# Altium PCB dian_recruitment_2022_V1.PcbDoc
Units mil, origin at the board's own origin, x right, y up, seen from the top; angles counter-clockwise.
Board outline 1377.95 x 1771.65 mil, 2 copper layers (Top Layer, Bottom Layer); 48 components, 35 nets, 214 pads, 93 vias.
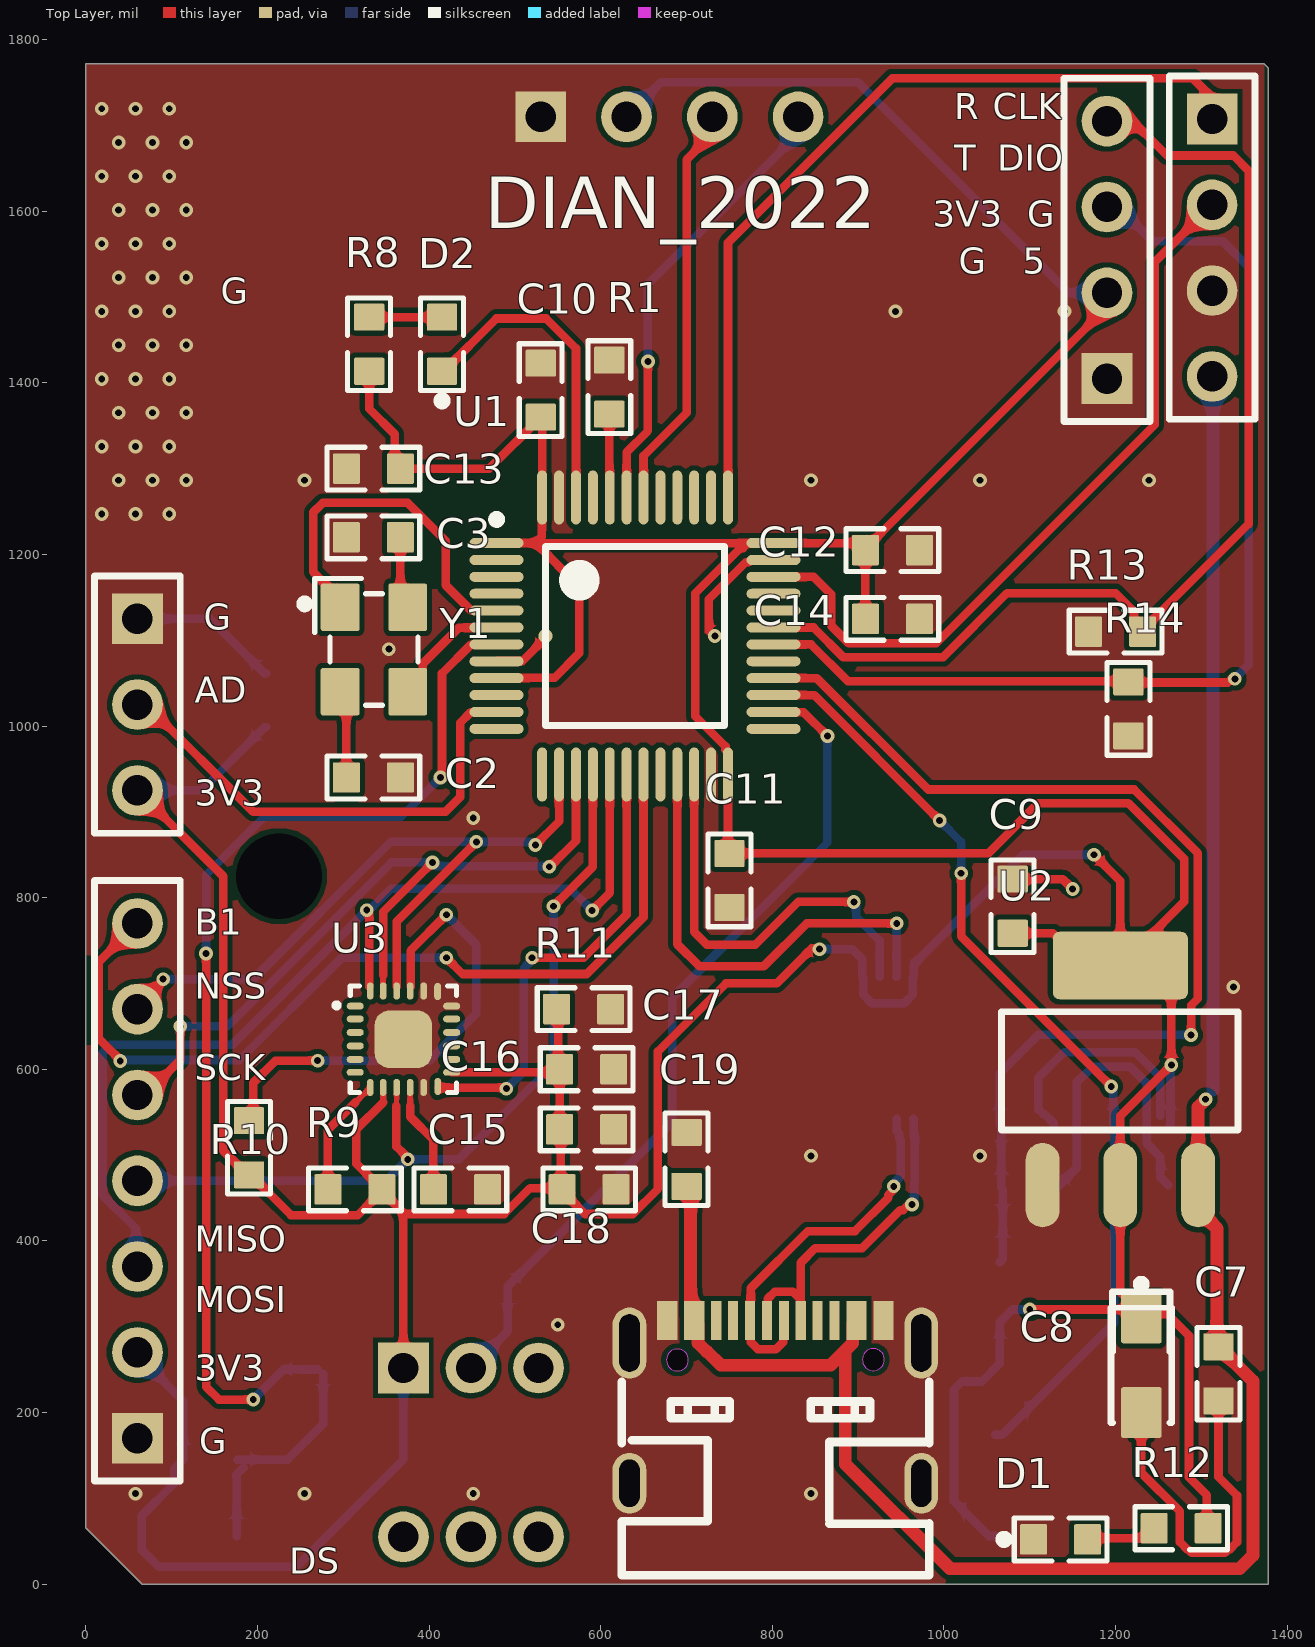
[diagram p0: Top Layer view]
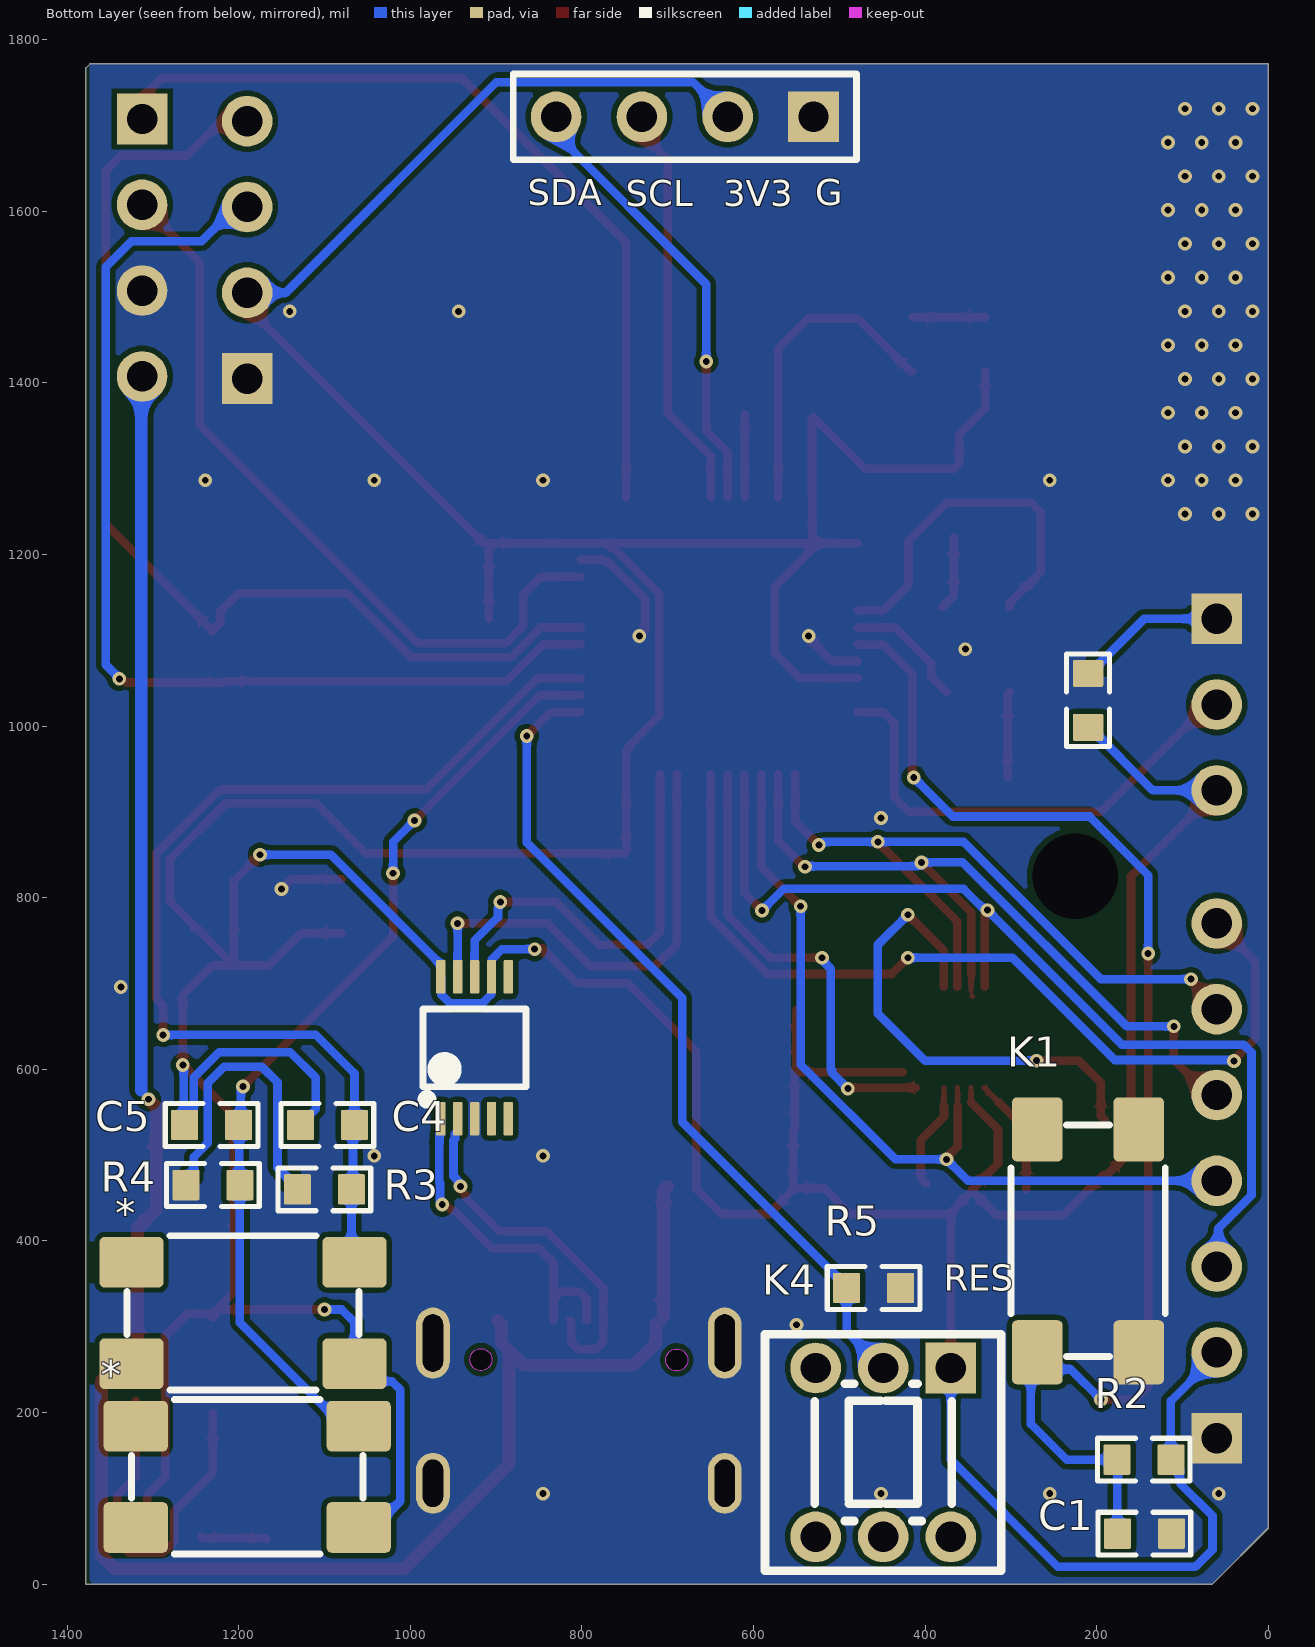
[diagram p1: Bottom Layer view, seen from below]
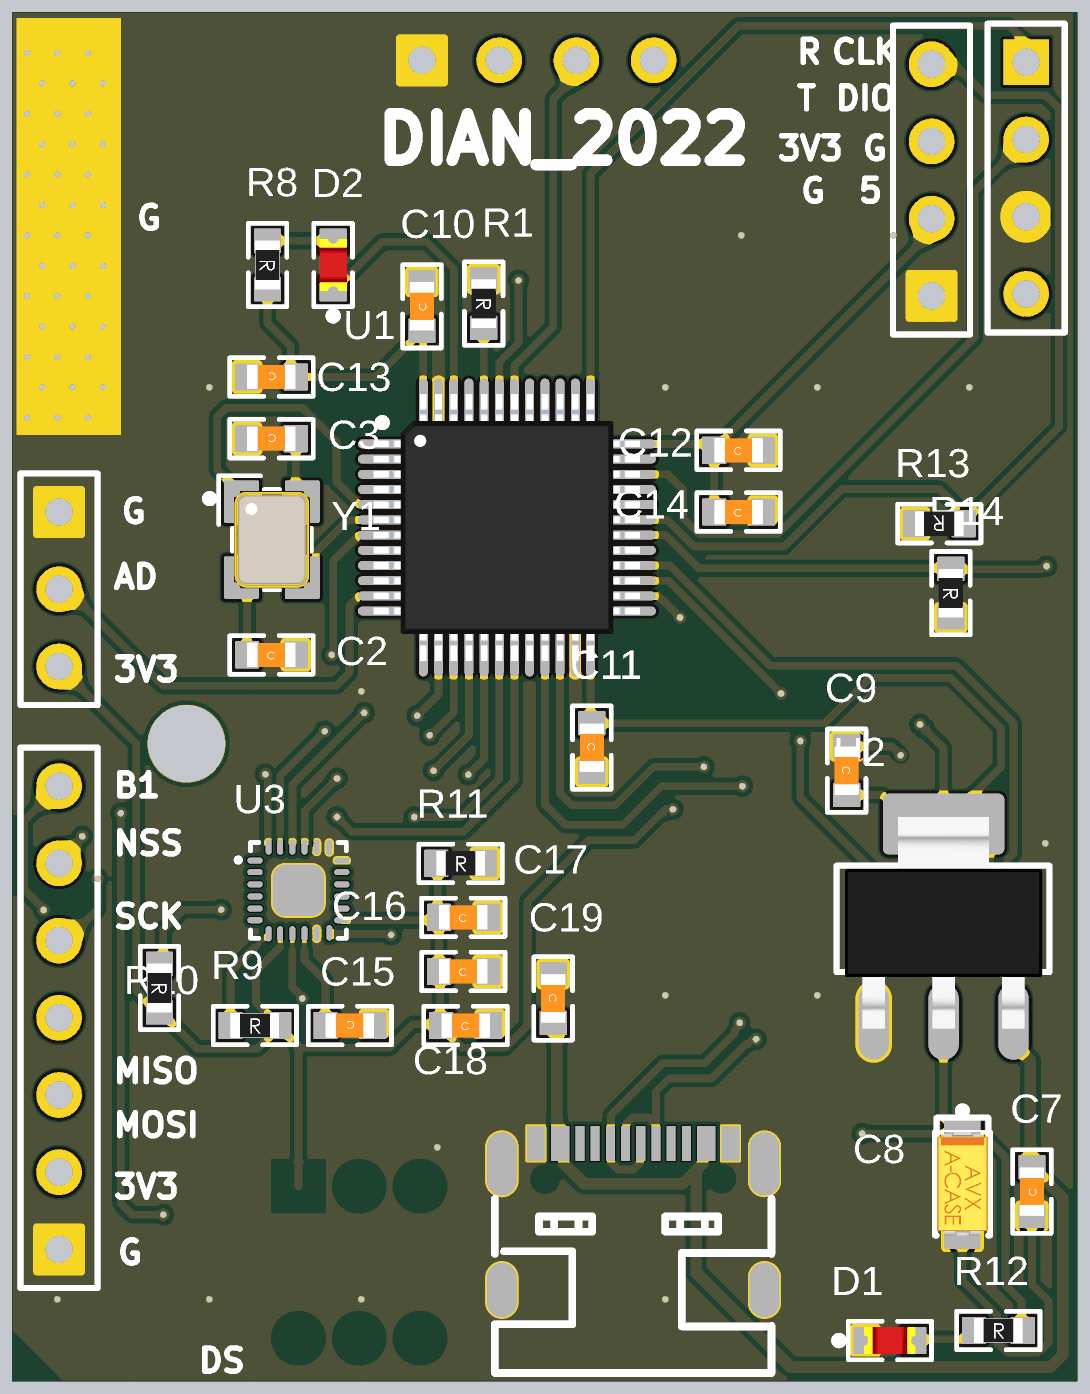
[diagram p2: 3D render of the assembled board from above, using the file's embedded part models]
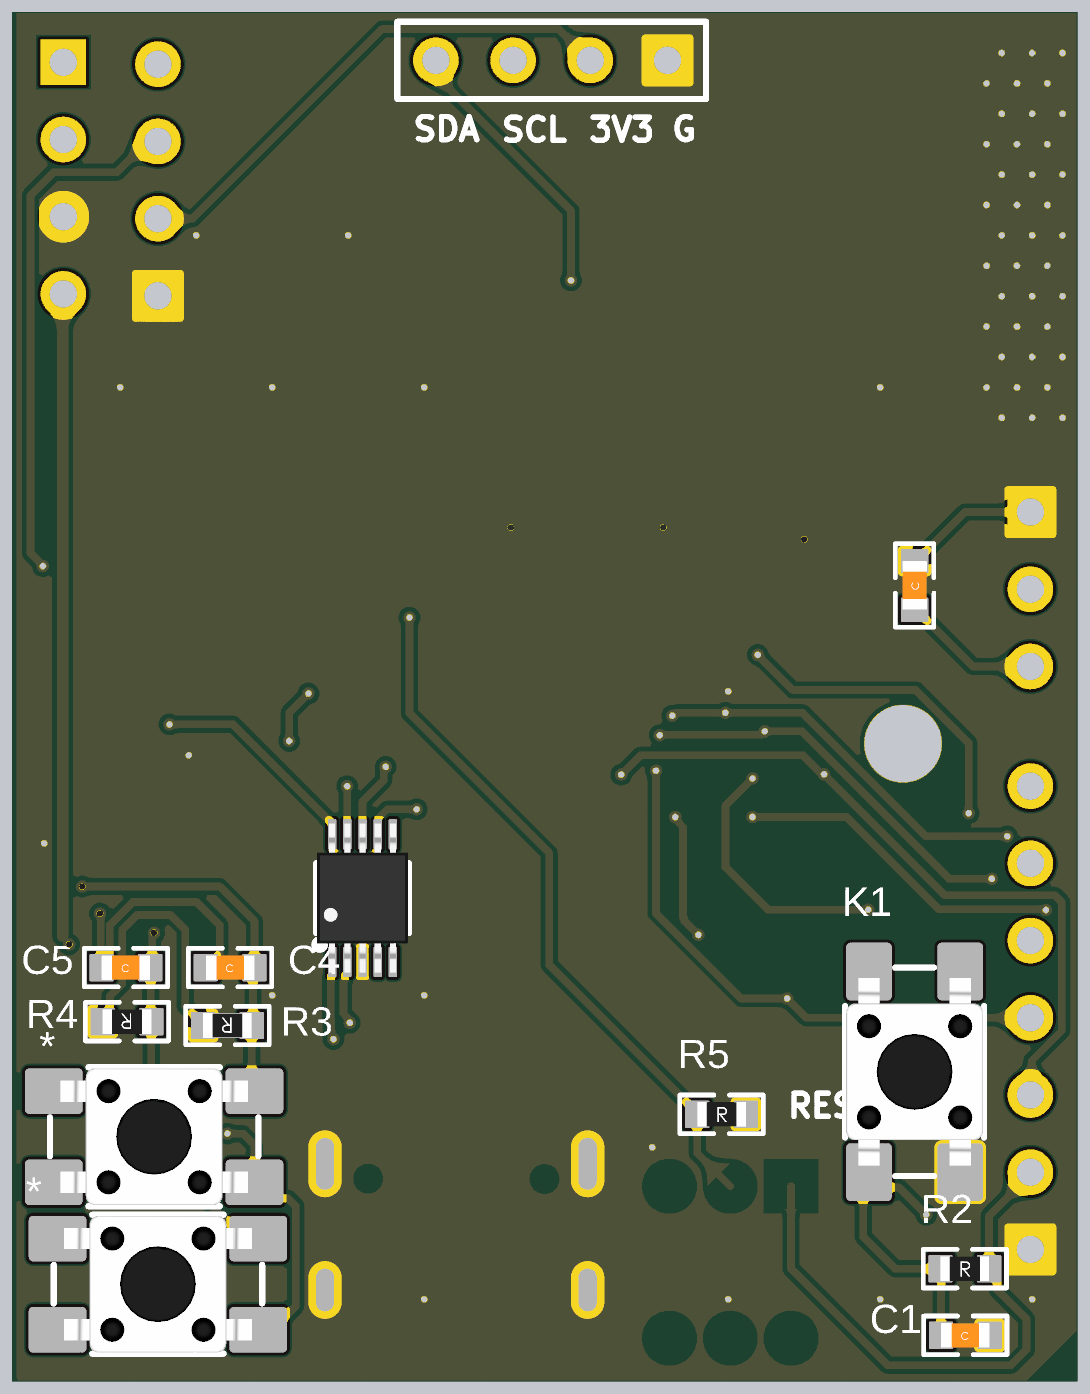
[diagram p3: 3D render of the assembled board from below, using the file's embedded part models]

## Layer stack, top to bottom
Top Solder: solder mask 0.4, Solder Resist, Dk 3.5
Top Layer: signal copper 1.4
Dielectric 1: dielectric 12.6, FR-4, Dk 4.8
Bottom Layer: signal copper 1.4
Bottom Solder: solder mask 0.4, Solder Resist, Dk 3.5

## Board outline
0,65 65,0 1377.95,0 1377.95,1767.05 1373.35,1771.65 0,1771.65

## Design rules (kind name [scope] priority, off if disabled: settings)
Clearance [All] p1: gap=6 ignorepadtopadclearanceinfootprint=FALSE
DiffPairsRouting DiffPairsRouting_1 [All] p1: maxlimit=10 minlimit=10 mostfreqgap=10 toplayer_minwidth=15 toplayer_maxwidth=15 toplayer_prefwidth=15 bottomlayer_minwidth=15 bottomlayer_maxwidth=15 bottomlayer_prefwidth=15 maxuncoupledlength=500
DiffPairsRouting DiffPair_DiffPairsRouting [All] p2: maxlimit=10 minlimit=10 mostfreqgap=10 toplayer_minwidth=10 toplayer_maxwidth=10 toplayer_prefwidth=10 bottomlayer_minwidth=10 bottomlayer_maxwidth=10 bottomlayer_prefwidth=10 maxuncoupledlength=500
DiffPairsRouting DiffPair_DiffPairsRouting_1 [InDifferentialPair ('NewDifferentialPair1')] p3: maxlimit=10 minlimit=10 mostfreqgap=10 toplayer_minwidth=10 toplayer_maxwidth=15 toplayer_prefwidth=10 bottomlayer_minwidth=10 bottomlayer_maxwidth=15 bottomlayer_prefwidth=10 maxuncoupledlength=500
DiffPairsRouting [All] p4: maxlimit=10 minlimit=10 mostfreqgap=10 toplayer_minwidth=15 toplayer_maxwidth=15 toplayer_prefwidth=15 bottomlayer_minwidth=15 bottomlayer_maxwidth=15 bottomlayer_prefwidth=15 maxuncoupledlength=500
MatchedLengths [All] p1: tolerance=1000 checknetsindiffpair=FALSE checkdiffpairvsdiffpair=TRUE checkxsignals=TRUE checkothers=TRUE
MatchedLengths DiffPair_MatchedLengths [All] p2: tolerance=1000 checknetsindiffpair=FALSE checkdiffpairvsdiffpair=TRUE checkxsignals=TRUE checkothers=TRUE
MatchedLengths DiffPair_MatchedLengths_1 [InDifferentialPair ('NewDifferentialPair1')] p3: tolerance=1000 checknetsindiffpair=FALSE checkdiffpairvsdiffpair=TRUE checkxsignals=TRUE checkothers=TRUE
PolygonConnect [All] p1: connectstyle=Direct reliefconductorwidth=10 reliefentries=4 polygonreliefangle="90 Angle" airgapwidth=10
RoutingVias [All] p1: holewidth=8 width=16 viastyle="Through Hole" minholewidth=0 minwidth=0 maxholewidth=8 maxwidth=16
SolderMaskExpansion [All] p1: expansion=4 istentingtop=FALSE
Width ALL [All] p1: maxlimit=15 minlimit=6 preferedwidth=10
29 further rules are at their usual default settings.

## Classes and differential pairs
component class dian_recruitment_2022_V1: C1 C2 C3 C4 C5 C7 C8 C9 C10 C11 C12 C13 C14 C15 C16 C17 C18 C19 D1 D2 K1 K4 R1 R2 R3 R4 R5 R8 R9 R10 R11 R12 R13 R14 U1 U2 U3 Y1

## Components (designator, comment, footprint, x,y, rotation, side; value= is the part's Value field where it differs from the comment)
* "PB13" KEY-4.5*4.5mm 1190,125 r0 bottom value=1TS002E-2500-2501-CT_3*6*2.5_SMD2.5 (schematic designator K3)
* "PB13" KEY-4.5*4.5mm 1194.92,315.94 r0 bottom value=1TS002E-2500-2501-CT_3*6*2.5_SMD2.5 (schematic designator K2)
C1 "100nF" 0603_C 144.25,58.74 r180 bottom
C2 "20pF" 0603_C 335,940 r0 top
C3 "20pF" 0603_C 335,1220 r180 top
C4 "104" 0603_C 1096.5,535 r180 bottom
C5 "104" 0603_C 1231.5,535 r180 bottom
C6 "104" 0603_C 210,1030 r90 bottom
C7 "0.1uF" 0603_C 1320,245 r90 top
C8 "220uF" CTan-A 1230,255 r90 top
C9 "0.1uF" 0603_C 1080,790 r270 top
C10 "100nF" 0603_C 530,1391.5 r90 top
C11 "100nF" 0603_C 750,820 r270 top
C12 "100nF" 0603_C 940,1205 r0 top
C13 "100nF" 0603_C 335,1300 r180 top
C14 "100nF" 0603_C 940,1125 r0 top
C15 "100nF" 0603_C 436.5,460 r180 top
C16 "10nF" 0603_C 583.5,530 r0 top
C17 "100nF" 0603_C 583.5,600 r0 top
C18 "1uF" 0603_C 586.5,460 r0 top
C19 "104" 0603_C 700,495 r270 top
D1 "PC4" 0603_LED_RED 1135.94,52 r0 top
D2 "PC4" 0603_LED_RED 415,1445 r90 top
K1 "NRST" KEY-4.5*4.5mm 210,400 r90 bottom value=1TS002E-2500-2501-CT_3*6*2.5_SMD2.5
K4 "PB13" key 1701.55,250.64 r180 bottom value=1TS002E-2500-2501-CT_3*6*2.5_SMD2.5
P1 "Header 4" HDR1X4 1312.5,1707.5 r270 top
P2 "Header 4" HDR1X4 530,1710 r0 bottom
P3 "Header 3" HDR1X3 60,1125 r270 top
P4 "Header 4" HDR1X4 1190,1405 r90 top
P5 "Header 7" HDR1X7 60,170 r90 top
R1 "10K" 0603_R 610,1395 r270 top
R2 "10K" 0603_R 145,145 r180 bottom
R3 "10K" 0603_R 1100,460 r0 bottom
R4 "10K" 0603_R 1230,465 r0 bottom
R5 "10K" 0603_R 460,345 r180 bottom
R8 "Res2" 0603_R 330,1445 r270 top value=2K
R9 "4.7K" 0603_R 313.5,460 r0 top
R10 "4.7K" 0603_R 190,508.5 r270 top
R11 "4.7K" 0603_R 580,670 r0 top
R12 "Res2" 0603_R 1276.5,65 r0 top value=2K
R13 "10K" 0603_R 1200,1110 r180 top
R14 "10K" 0603_R 1215,1020 r270 top
U1 "STM32F103C8T6" LQFP-48P 640,1105 r270 top
U2 "AMS1117-3.3" SOT-223 1205.55,592.95 r270 top
U3 "MPU6500" QFN24 375,630 r270 top
USB1 "TYPEC-304-ACP16" USB_TYPEC 820,135 r0 top
Y1 "8M" XTAL-3225 335.63,1089.21 r0 top value=1C208000CE0R_SMD-3225_4P_SMD0.85
? "" MSOP-10P[0.5] 925,625 r90 bottom

## Footprints (in the part's own frame and the unit in brackets; to place one, negate y for a bottom-side part, rotate by r counter-clockwise, add the part's x,y. Pads: shape width x height; smd on the part's side, far side on the other; paste and mask are expansions set on the pad)
0603_C [mm]
  rrect10% 0.8x0.9 smd: 1(-0.8,0) 2(0.8,0)
  silkscreen extent -1.37,-0.64 1.37,0.64, body extent -0.8,-0.4 0.8,0.41, height 0.87
0603_LED_RED [mm]
  rrect10% 0.8x0.9 smd: 1(0.8,0) 2(-0.8,0)
  silkscreen extent -1.8,-0.64 1.37,0.64, body extent -0.85,-0.45 0.85,0.45, height 0.9
0603_R [mm]
  rrect10% 0.8x0.9 smd: 1(-0.8,0) 2(0.8,0)
  silkscreen extent -1.37,-0.64 1.37,0.64, body extent -0.8,-0.41 0.8,0.41, height 0.51
CTan-A [mm]
  rrect10% 1.5x1.2 smd: 1(1.4,0) 2(-1.4,0)
  silkscreen extent -1.7,-0.9 2.52,0.9, body extent -1.7,-0.84 1.7,0.84, height 1.71
HDR1X3 [mm] "Connector; Header; 3 Position"
  rect 1.5x1.5 hole 0.9: 1(0,0)
  round 1.5 hole 0.9: 2(2.54,0) 3(5.08,0)
  silkscreen extent -1.27,-1.27 6.35,1.27
HDR1X4 [mm] "Connector; Header; 4 Position"
  rect 1.5x1.5 hole 0.9: 1(0,0)
  round 1.5 hole 0.9: 2(2.54,0) 3(5.08,0) 4(7.62,0)
  silkscreen extent -1.27,-1.27 8.89,1.27
HDR1X7 [mm] "Connector; Header; 7 Position"
  rect 1.5x1.5 hole 0.9: 1(0,0)
  round 1.5 hole 0.9: 2(2.54,0) 3(5.08,0) 4(7.62,0) 5(10.16,0) 6(12.7,0) 7(15.24,0)
  silkscreen extent -1.27,-1.27 16.51,1.27
key [mm]
  rect 1.5x1.5 hole 0.9 mask+0.05: 1(33.821,0.031)
  round 1.5 hole 0.9 mask+0.05: 2(31.821,0.031) 3(29.821,0.031) 4(33.821,-4.969) 5(31.821,-4.969) 6(29.821,-4.969)
  silkscreen extent 28.32,-5.97 35.32,1.03
KEY-4.5*4.5mm [mm]
  rrect20% 1.9x1.5 smd: 1(-3.3,1.5) 2(3.3,1.5) 3(-3.3,-1.5) 4(3.3,-1.5)
  silkscreen extent -3.43,-2.29 3.43,2.29, body extent -3.09,-2.25 3.09,2.25, height 3.8
LQFP-48P [mm]
  oval 0.295x1.6 smd: 1(-2.75,-4.1) 2(-2.25,-4.1) 3(-1.75,-4.1) 4(-1.25,-4.1) 5(-0.75,-4.1) 6(-0.25,-4.1) 7(0.25,-4.1) 8(0.75,-4.1) 9(1.25,-4.1) 10(1.75,-4.1) 11(2.25,-4.1) 12(2.75,-4.1) 25(2.75,4.1) 26(2.25,4.1) 27(1.75,4.1) 28(1.25,4.1) 29(0.75,4.1) 30(0.25,4.1) 31(-0.25,4.1) 32(-0.75,4.1) 33(-1.25,4.1) 34(-1.75,4.1) 35(-2.25,4.1) 36(-2.75,4.1)
  oval 1.6x0.295 smd: 13(4.1,-2.75) 14(4.1,-2.25) 15(4.1,-1.75) 16(4.1,-1.25) 17(4.1,-0.75) 18(4.1,-0.25) 19(4.1,0.25) 20(4.1,0.75) 21(4.1,1.25) 22(4.1,1.75) 23(4.1,2.25) 24(4.1,2.75) 37(-4.1,2.75) 38(-4.1,2.25) 39(-4.1,1.75) 40(-4.1,1.25) 41(-4.1,0.75) 42(-4.1,0.25) 43(-4.1,-0.25) 44(-4.1,-0.75) 45(-4.1,-1.25) 46(-4.1,-1.75) 47(-4.1,-2.25) 48(-4.1,-2.75)
  silkscreen extent -3.57,-4.22 2.65,2.65, body extent -4.39,-4.39 4.39,4.39, height 1.55
MSOP-10P[0.5] [mm]
  rrect30% 1x0.28 smd: 1(-2.1,1) 2(-2.1,0.5) 3(-2.1,0) 4(-2.1,-0.5) 5(-2.1,-1) 6(2.1,-1) 7(2.1,-0.5) 8(2.1,0) 9(2.1,0.5) 10(2.1,1)
  silkscreen extent -1.65,-1.52 1.15,1.53, body extent -2.45,-1.5 2.45,1.5, height 1.25
QFN24 [mm]
  oval 0.2x0.505 smd mask+0.051: 1(-1.108,-1.554) 2(-0.727,-1.554) 3(-0.327,-1.554) 4(0.073,-1.554) 5(0.473,-1.554) 6(0.854,-1.554) 13(0.854,1.3) 14(0.473,1.3) 15(0.073,1.3) 16(-0.327,1.3) 17(-0.727,1.3) 18(-1.108,1.3)
  oval 0.505x0.2 smd mask+0.051: 7(1.3,-1.108) 8(1.3,-0.727) 9(1.3,-0.327) 10(1.3,0.073) 11(1.3,0.473) 12(1.27,0.889) 19(-1.538,0.885) 20(-1.554,0.473) 21(-1.554,0.073) 22(-1.554,-0.327) 23(-1.554,-0.727) 24(-1.554,-1.108)
  rrect50% 1.7x1.7 smd mask+0.051: 25(-0.127,-0.127)
  silkscreen extent -1.7,-2.18 1.45,1.45
SOT-223 [mm]
  oval 2.5x1 smd: 1(3.25,-2.3) 2(3.25,0) 3(3.25,2.3)
  rrect20% 2x4 smd: 4(-3.25,0)
  silkscreen extent -1.88,-3.52 1.62,3.48, body extent -3.48,-3.25 3.48,3.25, height 1.65
USB_TYPEC [mm]
  rect 0.6x1.15 smd mask+0.05: A1B12(-3.618,4.375) A4B9(-2.818,4.375) B1A12(2.782,4.375) B4A9(1.982,4.375)
  rect 0.3x1.15 smd mask+0.05: A5(-1.668,4.375) A6(-0.668,4.375) A7(-0.168,4.375) A8(0.832,4.375) B5(1.332,4.375) B6(0.332,4.375) B7(-1.168,4.375) B8(-2.168,4.375)
  oval 1x1.8 hole 0.6 slot 1.4 at 90 deg mask+0.05: EP(-4.738,-0.445) EP(3.902,-0.445)
  oval 1x2.1 hole 0.6 slot 1.7 at 90 deg mask+0.05: EP(-4.738,3.705) EP(3.902,3.705)
  Keep-Out Layer board cut-out: 2.807,3.215 2.775,3.356 2.685,3.469 2.554,3.532 2.41,3.532 2.279,3.469 2.189,3.356 2.157,3.215 2.157,3.215 2.189,3.074 2.279,2.961 2.41,2.898 2.554,2.898 2.685,2.961 2.775,3.074 2.807,3.215
  Keep-Out Layer board cut-out: -2.993,3.205 -3.025,3.346 -3.115,3.459 -3.246,3.522 -3.39,3.522 -3.521,3.459 -3.611,3.346 -3.643,3.205 -3.643,3.205 -3.611,3.064 -3.521,2.951 -3.39,2.888 -3.246,2.888 -3.115,2.951 -3.025,3.064 -2.993,3.205
  silkscreen extent -4.97,-3.17 4.13,2.56
XTAL-3225 [mm]
  rrect10% 1.15x1.4 smd: 1(-1,1.25) 2(-1,-1.25) 3(1,-1.25) 4(1,1.25)
  silkscreen extent -2.17,-1.65 1.3,2.1, body extent -1.25,-1.6 1.25,1.6, height 0.61

## Part data
* * K1 K4: library part KEY, "KEY_SWI", Manufacturer=HYP, Assembly=SMD, Price_Batch=2.03, Price_Sample=2.03, Type=SWI
C1 C4 C5 C6 C10 C11 C12 C13 C14 C15 C16 C17 C18 C19: library part Capacitor
C2 C3: library part Capacitor_6
C7 C9: library part Cap, "Capacitor", LatestRevisionDate=17-Jul-2002, LatestRevisionNote="Re-released for DXP Platform.", PackageDescription="Radial Cap, Thru-Hole; 2 Leads; 0.3 in Pin Spacing", PackageReference=RAD-0.3, Published=8-Jun-2000, Publisher="Altium Limited"
C8: library part "Cap Pol1", "Polarized Capacitor (Radial)", LatestRevisionDate=17-Jul-2002, LatestRevisionNote="Re-released for DXP Platform.", PackageDescription="Polarized Capacitor (Radial); 2 Leads", PackageReference=RB7.6-15, Published=8-Jun-2000, Publisher="Altium Limited"
D1 D2: library part "0603 蓝灯", "发光二极管", Package=0603, SuppliersPartNumber=C72041, ComponentLink1Description=供应商链接, ComponentLink1URL=http://www.szlcsc.com/product/details_73150.html, Supplier=LC
P1 P2 P4: "Header, 4-Pin", LatestRevisionDate=17-Jul-2002, LatestRevisionNote="Re-released for DXP Platform.", Publisher="Altium Limited"
P3: "Header, 3-Pin", LatestRevisionDate=17-Jul-2002, LatestRevisionNote="Re-released for DXP Platform.", Publisher="Altium Limited"
P5: "Header, 7-Pin", LatestRevisionDate=17-Jul-2002, LatestRevisionNote="Re-released for DXP Platform.", Publisher="Altium Limited"
R1 R2 R3 R4 R5 R9 R10 R11 R13 R14: library part Resistor
R8 R12: "Resistor", LatestRevisionDate=17-Jul-2002, LatestRevisionNote="Re-released for DXP Platform.", PackageDescription="Axial Device, Thru-Hole; 2 Leads; 0.4 in Pin Spacing", PackageReference=AXIAL-0.4, Published=8-Jun-2000, Publisher="Altium Limited"
U2: library part AMS1117
U3: JLCPCB Part Class="Extended Part", Manufacturer="TDK InvenSense(应美盛)", Add into BOM=yes, Convert to PCB=yes, Datasheet=https://atta.szlcsc.com/upload/public/pdf/source/20170505/1493957890595.pdf, Device=MPU6500, LCSC Part Name=MPU6500, Manufacturer Part=MPU6500, Name=MPU6500, Supplier=LCSC, Supplier Footprint=QFN-24, Supplier Part=C50278, Symbol=MPU6500
USB1: Current Rating - Power (Max)=3A, JLCPCB Part Class="Extended Part", LCSC Part Name="Type-C 母座 卧贴", Manufacturer=XUNPU(讯普), Operating Temperature Range=-40℃~+85℃, Add into BOM=yes, Connector Type=Type-C, Convert to PCB=yes, Datasheet=https://atta.szlcsc.com/upload/public/pdf/source/20220311/3C907F75E12F45E4EE7F73565AB9C294.pdf, Device=TYPEC-304-ACP16, Gender=母座, Manufacturer Part=TYPEC-304-ACP16, Mounting Style=卧贴, Name=TYPEC-304-ACP16, Number of Contacts=16, Number of Ports=1, Supplier=LCSC, Supplier Footprint=SMD, Supplier Part=C2982555, Symbol=TYPEC-304-ACP16
Y1: library part XTAL_4P, "Crystal Oscillator", Manufacturer=EPS, Assembly=SMD, Type=CY
?: library part CH340E, "CH340E", JLCPCB Part Class="Extended Part", Manufacturer=WCH(南京沁恒), Supply Voltage="3.3V, 5V", Add into BOM=yes, Convert to PCB=yes, Data Rate=2Mbps, Datasheet=https://atta.szlcsc.com/upload/public/pdf/source/20200819/C99652_97FFC0DF2539BFF05CD752AD9221D632.pdf, Device=CH340E, LCSC Part Name=CH340E, Manufacturer Part=CH340E, Name=CH340E, Number of Drivers/Receivers=-, Protocol="USB 2.0", Supplier=LCSC, Supplier Footprint=MSOP-10, Supplier Part=C99652, Symbol=CH340E, Type=Transceiver

## Free pads (board coordinates)
  round 60 hole 100: 2(225,825)

## Via types
v1: diameter 16, hole 8, Top Layer to Bottom Layer, tented both sides, 77 vias
v2: diameter 15.98, hole 8, Top Layer to Bottom Layer, tented both sides, 16 vias

## Nets (pads, with @x,y where several pads share a name; then routed paths per layer and width w, separated by ;. In a path a pad name is that pad's centre, name@x,y a point inside that pad or via, vN(x,y) a via of type N, cw(c..) or ccw(c..) an arc to the next point about the centre after c; other vN are vias at no path point)
5V: C7.2 C19.2 P1.4 U2.3 USB1.A4B9 USB1.B4A9 | length 2488.8
  Top Layer w15: C19.2 704.74,458.76 704.74,311.56 USB1.A4B9 713.37,302.94 713.37,280.89 723.15,271.11 723.89,271.11 740,255 867.83,255 885,272.17 ; USB1.B4A9 893.72,302.94 893.72,280.89 885,272.17 ; v1(1305,565) 1305,564.73 1296.1,555.83 1296.1,436.43 1318.03,414.5 1318.03,278.46 C7.2 1321.97,276.5 1330.22,268.25 1330.22,266.28 1360,236.5 1360,33.35 1344.42,17.78 1007.22,17.78 885,140 885,272.17
  Bottom Layer w15: P1.4@1304.07,1415.93 P1.4 ; 1313.5,575.94 P1.4@1313.5,1407.5
ADC1: P3.2 U1.11 | length 569.4
  Top Layer w10: P3.2 70,1025 195,900 419.14,900 436.09,916.94 436.09,1003.69 448.5,1016.11 478.27,1016.11 U1.11
AUX_CL: R9.1 U3.7 | length 139.2
  Top Layer w6: 313.79,561.21 U3.7
  Top Layer w10: R9.1 282.01,529.43 313.79,561.21
AUX_DA: R10.1 U3.21 | length 570.3
  Top Layer w10: R10.1 195,545 195,584.14 220.86,610 v1(270,610) ; U3.21@378.32,696.14 378.32,738.32 v1(420,780)
  Bottom Layer w10: v1(270,610) 400,610 455,665 455,745 v1(420,780)
button1: *.3@1065,375 C4.2 R3.1 U1.28 | length 1255.4
  Top Layer w10: U1.28 851.8,1055.79 981.59,926 1221.63,926 1296,851.63 1296,682.3 1288,674.3 v1(1288,640)
  Bottom Layer w10: *.3@1065,375 1068.5,378.5 R3.1 ; C4.2 1065,595 1110,640 v1(1288,640) ; R3.1@1066.75,461.75 C4.2@1066.75,535
button2: *.3@1060.08,184.06 C5.2 R4.1 U1.27 | length 1117.5
  Top Layer w10: U1.27 848.86,1036.1 v1(995,890) ; v1(1020,828.5) 1020,755 v1(1195,580)
  Bottom Layer w10: v1(995,890) 1020,865 v1(1020,828.5) ; *.3@1060.08,174.06 1067.95,174.06 1198.5,304.61 R4.1 1199.25,465.74 1199.25,534.25 C5.2 1197.5,537.5 1197.5,577.5 v1(1195,580)
button_self_lock: K4.2 R5.1 U1.26 | length 982.9
  Top Layer w10: U1.26 801.73,1016.11 836.33,1016.11 v1(864.16,988.28)
  Bottom Layer w10: K4.2 491.5,294.6 R5.1 491.5,346.97 683.2,538.68 683.2,683.2 864.16,864.16 v1(864.16,988.28)
GND: ?.3 C1.2 C2.2 C3.2 C6.2 C7.1 C8.2 C9.1 C10.2 C11.2 C12.2 C13.2 C14.2 C15.1 C16.2 C17.2 C18.2 C19.1 D1.2 K1.3 P1.3 P2.1 P3.1 P4.1 P5.1 R1.1 R3.2 R4.2 R5.2 R11.2 R13.2 R14.2 U1.8 U1.23 U1.35 U1.47 U2.1 U3.11 U3.18 U3.19 U3.20 U3.25 USB1.A1B12 USB1.B1A12 USB1.EP | length 1243.2
  Top Layer w10: U1.8 478.89,1075.78 508.66,1075.78 535.67,1102.79 v1(535.67,1105) ; v1(733,1105) 731.86,1105 726,1110.86 726,1147.94 768.77,1190.7 772.41,1190.7 775.29,1193.58 U1.35 ; C9.1 1138.5,821.5 v1(1150,810) ; C8.2 1230,129.82 1275,84.82 1275,48.93 1283.93,40 1284.89,40 1288.61,36.28 1327.37,36.28 1331.09,40 1332.57,40 1341.5,48.93 1341.5,103.32 1320,124.82 C7.1
  Bottom Layer w10: P3.1 144.52,1125 208.03,1061.5 C6.2 ; R3.2 1131.5,461.97 1154.74,485.22 1154.74,584.74 1173,603 1217,603 1236.24,583.76 1236.24,513.66 1252.18,497.72 1252.18,474.32 R4.2
  other v1: 18.39,1247.09 57.76,1247.09 97.13,1247.09 38.07,1286.46 77.44,1286.46 116.81,1286.46 18.39,1325.83 57.76,1325.83 97.13,1325.83 38.07,1365.2 77.44,1365.2 116.81,1365.2 18.39,1404.57 57.76,1404.57 97.13,1404.57 38.07,1443.94 77.44,1443.94 116.81,1443.94 18.39,1483.31 57.76,1483.31 97.13,1483.31 38.07,1522.68 77.44,1522.68 116.81,1522.68 18.39,1562.05 57.76,1562.05 97.13,1562.05 38.07,1601.42 77.44,1601.42 116.81,1601.42 18.39,1640.79 57.76,1640.79 97.13,1640.79 38.07,1680.16 77.44,1680.16 116.81,1680.16 18.39,1719.53 57.76,1719.53 97.13,1719.53
  other v2: 57.76,105.35 254.61,105.35 451.46,105.35 845.16,105.35 549.88,302.2 845.16,499.06 1042.01,499.06 1337.28,695.91 451.46,892.76 353.03,1089.61 254.61,1286.46 845.16,1286.46 1042.01,1286.46 1238.86,1286.46 943.58,1483.31 1140.43,1483.31
I2C1_SCL: P2.3 U1.42 | length 476.8
  Top Layer w10: U1.42 649.84,1314.84 700,1365 700,1660 730,1690 P2.3
I2C1_SDA: P2.4 U1.43 | length 520.5
  Top Layer w10: U1.43 630.16,1319.1 655,1343.94 v1(655,1425)
  Bottom Layer w10: v1(655,1425) 655,1515 P2.4@840,1700
IMU_INT: U1.18 U3.12 | length 538.8
  Top Layer w10: U3.12@411.06,578.53 488.85,578.53 v1(490,577.38) ; v1(520,730) 580,730 630.16,780.16 U1.18
  Bottom Layer w10: v1(490,577.38) 508.49,595.87 508.49,598.49 510,600 510,717.14 520,727.14 v1(520,730)
IMU_VCC: *.1 ?.7 ?.10 C4.1 C5.1 C6.1 C8.1 C9.2 C10.1 C11.1 C12.1 C13.1 C14.1 C16.1 C17.1 C18.1 K4.1 P2.2 P3.3 P4.2 P5.2 R2.2 R8.2 R9.2 R10.2 R11.1 R12.2 U1.1 U1.9 U1.24 U1.36 U1.48 U2.2 U2.4 U3.8 U3.13 | length 8871.2
  Top Layer w6: 346.38,561.38 U3.8
  Top Layer w10: P3.3 160,825 160,505.03 188.03,477.01 R10.2 191.96,477.01 238.97,430 316.97,430 R9.2@345,458.03 ; R8.2 330,1370 360,1340 360,1306.49 C13.1 470,1300 C10.1 531.73,1358.27 U1.48 531.42,1266.11 531.42,1220.55 524.14,1213.27 ; 346.38,561.38 315,530 315,490 R9.2 R9.2@345,458.03 ; K4.1 370,433.03 ; U3.13 548.38,596.38 C17.1 C16.1 553.5,528.51 C18.1@553.5,461.5 ; U1.9 478.89,1056.1 546.1,1056.1 575,1085 575,1162.41 524.14,1213.27 ; U1.1 524.14,1213.27 ; R11.1 550.26,668.25 C17.1@550.26,601.76 ; C11.1@747.5,854 748.27,854.76 U1.24 748.27,969.71 745.39,972.59 745.39,976.23 710,1011.62 710,1154.57 761.14,1205.7 ; C11.1 1051.5,851.5 1110,910 1215,910 1280,845 1280,795.35 U2.4 ; 765.79,1207.41 771.34,1212.96 U1.36@771.34,1213.27 ; v1(855,740) 854.14,740.86 845.86,740.86 805,700 745.86,700 666.62,620.76 666.62,460.52 637.37,431.28 581.75,431.28 555,458.03 C18.1 C18.1@553.5,461.5 ; C14.1 C12.1 C12.1@900.24,1213.27 ; C9.2 1127.03,758.5 1164.63,720.91 U2.4 ; v1(1100,320) C8.1@1220.12,320 ; v1(1175,850) 1205.55,819.45 U2.4 ; P4.2 1180.61,1495.61 1180.61,1479.08 914.8,1213.27 C12.1@900.24,1213.27 ; C8.1@1227.05,313.07 C8.1 ; R12.2@1306.5,55 1306.5,103.5 1285.62,124.38 1285.62,289.38 1260,315 1230,315 1230,316.02 1205.55,340.47 U2.2 1205.55,545.55 v1(1265,605) 1265,686.75 1230.85,720.91 U2.4 ; R9.2@345,458.03 370,433.03 ; 370,433.03 371.75,431.28 487.37,431.28 517.59,461.5 C18.1@553.5,461.5 ; 524.14,1213.27 U1.36@771.34,1213.27 ; U1.36@771.34,1213.27 U1.36 C12.1@900.24,1213.27
  Bottom Layer w10: P5.2 60,267 113.5,213.49 R2.2 102.76,134.25 102.76,117.28 65,79.52 65,40 85,20 245,20 370,145 K4.1 ; P3.3 134.53,925 208.03,998.5 C6.1 ; P2.2 670.53,1750.53 899.47,1750.53 1145,1505 P4.2 ; v1(855,740) 893.09,740 904.8,728.29 904.8,708.19 ?.7 905.83,707.17 905.83,687.07 915.9,676.99 953.78,676.99 963.86,687.07 963.86,707.17 ?.10 964.88,708.19 964.88,722.36 1092.52,850 v1(1175,850) ; *.1@1060.08,55.94 1052.2,55.94 1011.68,96.47 1011.68,226.68 1021.1,236.1 1044.21,236.1 1065,256.89 1065,305 1080,320 v1(1100,320) ; C4.1 1127.99,536.97 1117.24,547.72 1115.86,547.72 1110,553.58 1110,590 1140,620 1222.63,620 1252.24,590.38 C5.1@1252.24,545.75 ; C5.1 1264,536.01 1264,604 v1(1265,605)
LED: D2.2 U1.46 | length 369.8
  Top Layer w10: D2.2 416.97,1413.5 478.46,1475 536.29,1475 571.1,1440.19 U1.46
NetC2_1: C2.1 Y1.2 | length 100.9
  Top Layer w10: Y1.2@301.26,1040 303.5,1037.76 C2.1
NetC3_1: C3.1 Y1.4 | length 87.2
  Top Layer w10: C3.1 366.5,1151.93 Y1.4@380,1138.43
NetC15_2: C15.2 U3.10 | length 126.1
  Top Layer w6: 377.87,557.13 U3.10
  Top Layer w10: 377.87,557.13 377.87,544.61 405,517.48 405,472.72 C15.2@398.82,466.54
NetD1_A: D1.1 R12.1 | length 77.3
  Top Layer w10: D1.1 1168.94,53.5 1242,53.5 R12.1@1243.5,55
NetD2_A: D2.1 R8.1 | length 85
  Top Layer w10: R8.1 D2.1
NetR1_2: R1.2 U1.44 | length 96.7
  Top Layer w10: U1.44@610,1266.89 610.16,1267.06 610.16,1293.56 610,1293.72 R1.2
NRST: C1.1 K1.1 R2.1 U1.7 | length 1527.7
  Top Layer w10: v1(140,735) 140,230 155,215 v1(195,215) ; v1(413.09,940) 415,941.91 415,1061.35 448.5,1094.85 478.27,1094.85 U1.7
  Bottom Layer w10: v1(140,735) 140,826.27 208.29,894.56 367.65,894.56 v1(413.09,940) ; C1.1@175.75,55.75 C1.1 175.75,124.25 175,125 175,126.97 R2.1@183.78,135.75 ; R2.1 235,145 276.57,186.57 K1.1@276.57,245 ; v1(195,215) 230.39,250.39 249.36,250.39 248.98,250 K1.1@270,250
OSC_IN: U1.5 Y1.1 | length 426.1
  Top Layer w10: Y1.1@301.26,1138.43 301.26,1143.35 265,1179.61 265,1249.14 275.86,1260 375,1260 419.24,1215.76 419.24,1164.09 448.5,1134.84 478.27,1134.84 U1.5
OSC_OUT: U1.6 Y1.3 | length 143.4
  Top Layer w10: Y1.3 392.54,1057.54 392.54,1072.54 434.53,1114.53 478.27,1114.53 U1.6
PB1: P5.7 U1.19 | length 1050.7
  Top Layer w10: v1(40,609.62) 40,610.75 15,635.75 15,725 P5.7 ; v1(420,730) 439,711 583.63,711 649.84,777.22 U1.19
  Bottom Layer w10: v1(40,609.62) 41.13,610.75 178.88,610.75 298.13,730 v1(420,730)
SPI1_MISO: P5.4 U1.16 U3.9 | length 987.5
  Top Layer w6: 361.87,557.13 362.13,557.39 U3.9
  Top Layer w10: 361.87,557.13 361.87,509.99 372,499.86 372,499.62 375,496.62 v1(375,495) ; v1(545,790) 590.79,835.79 U1.16
  Bottom Layer w10: P5.4 350,470 v1(375,495) 434.49,495 545,605.51 v1(545,790)
SPI1_MOSI: P5.3 U1.17 U3.24 | length 1182.1
  Top Layer w10: v1(327.29,785.42) 327.29,783.8 330.32,780.77 U3.24@330.32,696.14 ; v1(590,785) 610.47,805.47 U1.17
  Bottom Layer w10: P5.3 58.16,371.84 58.16,414.53 19.47,453.21 19.47,619.47 28.62,628.62 170.49,628.62 v1(327.29,785.42) ; v1@329.42,784.42 355.15,810.15 564.85,810.15 v1(590,785)
SPI1_NSS: P5.6 U1.14 U3.22 | length 850.1
  Top Layer w10: P5.6 60,673.38 90,703.38 v1(90,705) ; U3.22@362.32,696.14 362.32,772.32 v1(455,865) ; v1(523.77,861.23) 551.42,888.88 U1.14
  Bottom Layer w10: v1(90,705) 195,705 355,865 518.38,865 522.15,861.23 v1(523.77,861.23)
SPI1_SCK: P5.5 U1.15 U3.23 | length 906.1
  Top Layer w6: U3.23@345,685.02 U3.23@345.38,685.4 ; 346.32,709.62 346.32,691.26 U3.23
  Top Layer w10: P5.5 69.25,570 110,610.75 v1(110,650) ; 346.32,709.62 346.32,783.32 v1(404.02,841.02) ; v1(540,836) 541,836 571.1,866.1 U1.15
  Bottom Layer w10: v1@115,650 165,650 356.02,841.02 v1(404.02,841.02) ; v1@404.02,837.17 407.84,837.17 408.43,836.59 539.41,836.59 v1(540,836)
SWCLK: P1.1 U1.37 | length 967.5
  Top Layer w10: U1.37 748.27,1563.27 940,1755 1290,1755 P1.1@1325,1720
SWDIO: P1.2 U1.34 | length 887.4
  Top Layer w10: U1.34 847.91,1173.9 868.52,1153.29 868.52,1116.89 889.13,1096.28 990.88,1096.28 1245.53,1350.93 1245.53,1540.53 P1.2
UART1_RX: P4.4 R13.1 U1.31 | length 1268.5
  Top Layer w10: U1.31 847.94,1114.84 882.5,1080.28 998.89,1080.28 1073.61,1155 1200,1155 1221.37,1133.63 1221.37,1120.12 R13.1 ; P4.4@1205,1720 1260,1665 1337.31,1665 1355,1647.31 1355,1235.47 R13.1@1231.5,1111.97
UART1_TX: P4.3 R14.1 U1.30 | length 1238.4
  Top Layer w10: U1.30 845,1095.16 887.79,1052.36 1215,1052.36 1216.62,1050.75 1330.96,1050.75 1335.21,1055 v1(1339,1055)
  Bottom Layer w10: P4.3 1203.27,1605 1243.27,1565 1325,1565 1355,1535 1355,1071.53 1339,1055.53 v1(1339,1055)
UART3_RX: ?.8 U1.22 | length 496.1
  Top Layer w10: U1.22 708.9,760.01 723.64,745.26 780.26,745.26 830,795 v1(895,795)
  Bottom Layer w10: v1(895,795) 896.15,793.85 896.15,789.61 897.68,788.08 897.68,777.32 925,750 ?.8
UART3_TX: ?.9 U1.21 | length 547.4
  Top Layer w10: U1.21 689.21,745.79 715,720 790,720 840,770 v1(945,770)
  Bottom Layer w10: ?.9 944.84,707.83 944.84,769.84 v1(945,770)
USB_DM: ?.2 USB1.A7 USB1.B7 | length 437.6
  Top Layer w10: USB1.A7 812.48,306.34 812.48,281.92 804.17,273.61 783.24,273.61 774.92,281.93 774.92,306.34 USB1.B7 774.92,308.15 774.92,344.69 841.53,411.3 896.3,411.3 935,450 935,453.28 941.46,459.75 v1(941.46,463.54)
  Bottom Layer w10: v1(941.46,463.54) 941.46,467.32 949.6,475.46 949.6,517.31 947.86,519.05 947.86,524.98 945.2,527.64 ?.2@945.2,542.32
USB_DP: ?.1 USB1.A6 USB1.B6 | length 397.2
  Top Layer w10: USB1.A6 794.61,308.15 794.61,332.57 802.92,340.89 823.85,340.89 831.9,332.83 832.17,332.83 ; USB1.B6 833.07,332.83 833.07,374.56 849.82,391.3 904.59,391.3 949.14,435.86 952.42,435.86 958.89,442.32 v1(962.68,442.32)
  Bottom Layer w10: v1(962.68,442.32) 965.36,445 965.36,467.86 966.11,468.62 966.11,524.15 964.88,525.38 964.88,541.81 ?.1
pads on no net: *.2 *.4 ?.4 ?.5 ?.6 K1.2 K1.4 K4.3 K4.4 K4.5 K4.6 U1.2 U1.3 U1.4 U1.10 U1.12 U1.13 U1.20 U1.25 U1.29 U1.32 U1.33 U1.38 U1.39 U1.40 U1.41 U1.45 U3.1 U3.2 U3.3 U3.4 U3.5 U3.6 U3.14 U3.15 U3.16 U3.17 USB1.A5 USB1.A8 USB1.B5 USB1.B8

## Polygon pours and split planes (outlines as drawn)
GND on Bottom Layer "GND_L02_P001" (solid, remove dead copper, pour order 1): 0,1771.65 1373.35,1771.65 1373.35,4.61 1375.65,2.3 1373.35,0 65,0 0,65
GND on Top Layer "GND_L01_P000" (solid, remove dead copper, pour order 0): 0,1771.65 1373.35,1771.65 1373.35,4.61 1377.95,0 65,0 0,65

## Silkscreen, mask and mechanical layers (free items; w line width, h text height)
Top Overlay:
  text "R" at 1012,1707 h30
  text "CLK" at 1057,1707 h30
  text "T" at 1012,1647 h30
  text "DIO" at 1062,1647 h30
  text "3V3" at 987,1582 h30
  text "G" at 1097,1582 h30
  text "DIAN_2022" at 465,1580 h60
  text "G" at 1017,1527 h30
  text "5" at 1092,1527 h30
  text "G" at 157,1492 h30
  text "G" at 137,1112 h30
  text "AD" at 127,1027 h30
  text "3V3" at 127,907 h30
  text "B1" at 127,757 h30
  text "NSS" at 127,682 h30
  text "SCK" at 127,587 h30
  text "MISO" at 127,387 h30
  text "MOSI" at 127,317 h30
  text "3V3" at 127,237 h30
  text "G" at 132.32,152 h30
  text "DS" at 237,12 h30
Bottom Overlay:
  text "G" at 528,1607 h30
  text "SDA" at 863,1607 h30
  text "3V3" at 635.23,1606.09 h30
  text "SCL" at 748.68,1606.09 h30
  text "RES" at 378,342 h30
Top Solder:
  rectangle: 5,1225 140,1765
Mechanical 1:
  the board outline again, w10